# Altium PCB FPGA_Module_Panel.PcbDoc
Units mm, origin at the board's own origin, x right, y up, seen from the top; angles counter-clockwise.
Board outline 102 x 70 mm, 6 copper layers (Top Layer, Int1 (GND), Int2 (Sign), Int3 (Sign), Int4 (GND), Bottom Layer), stack 1.482 mm thick; 12 components, 210 nets, 12 pads, 0 vias.
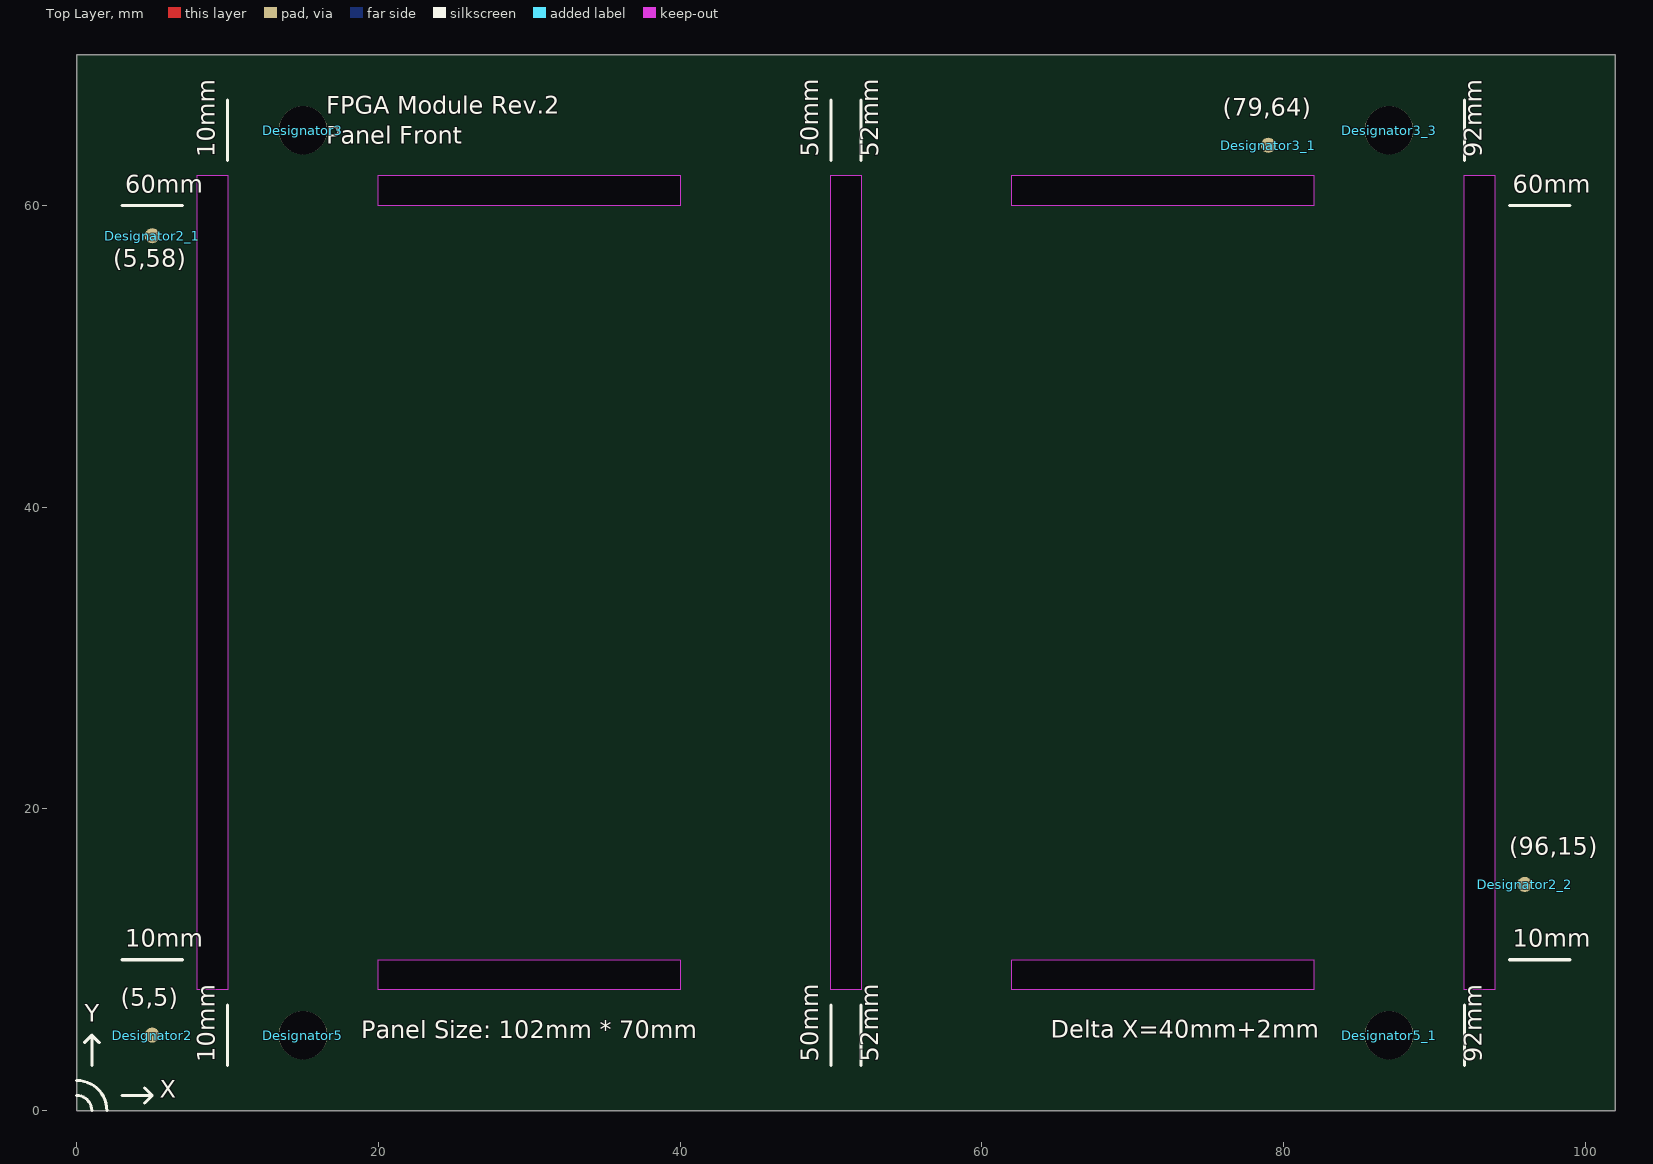
[diagram p0: Top Layer view]
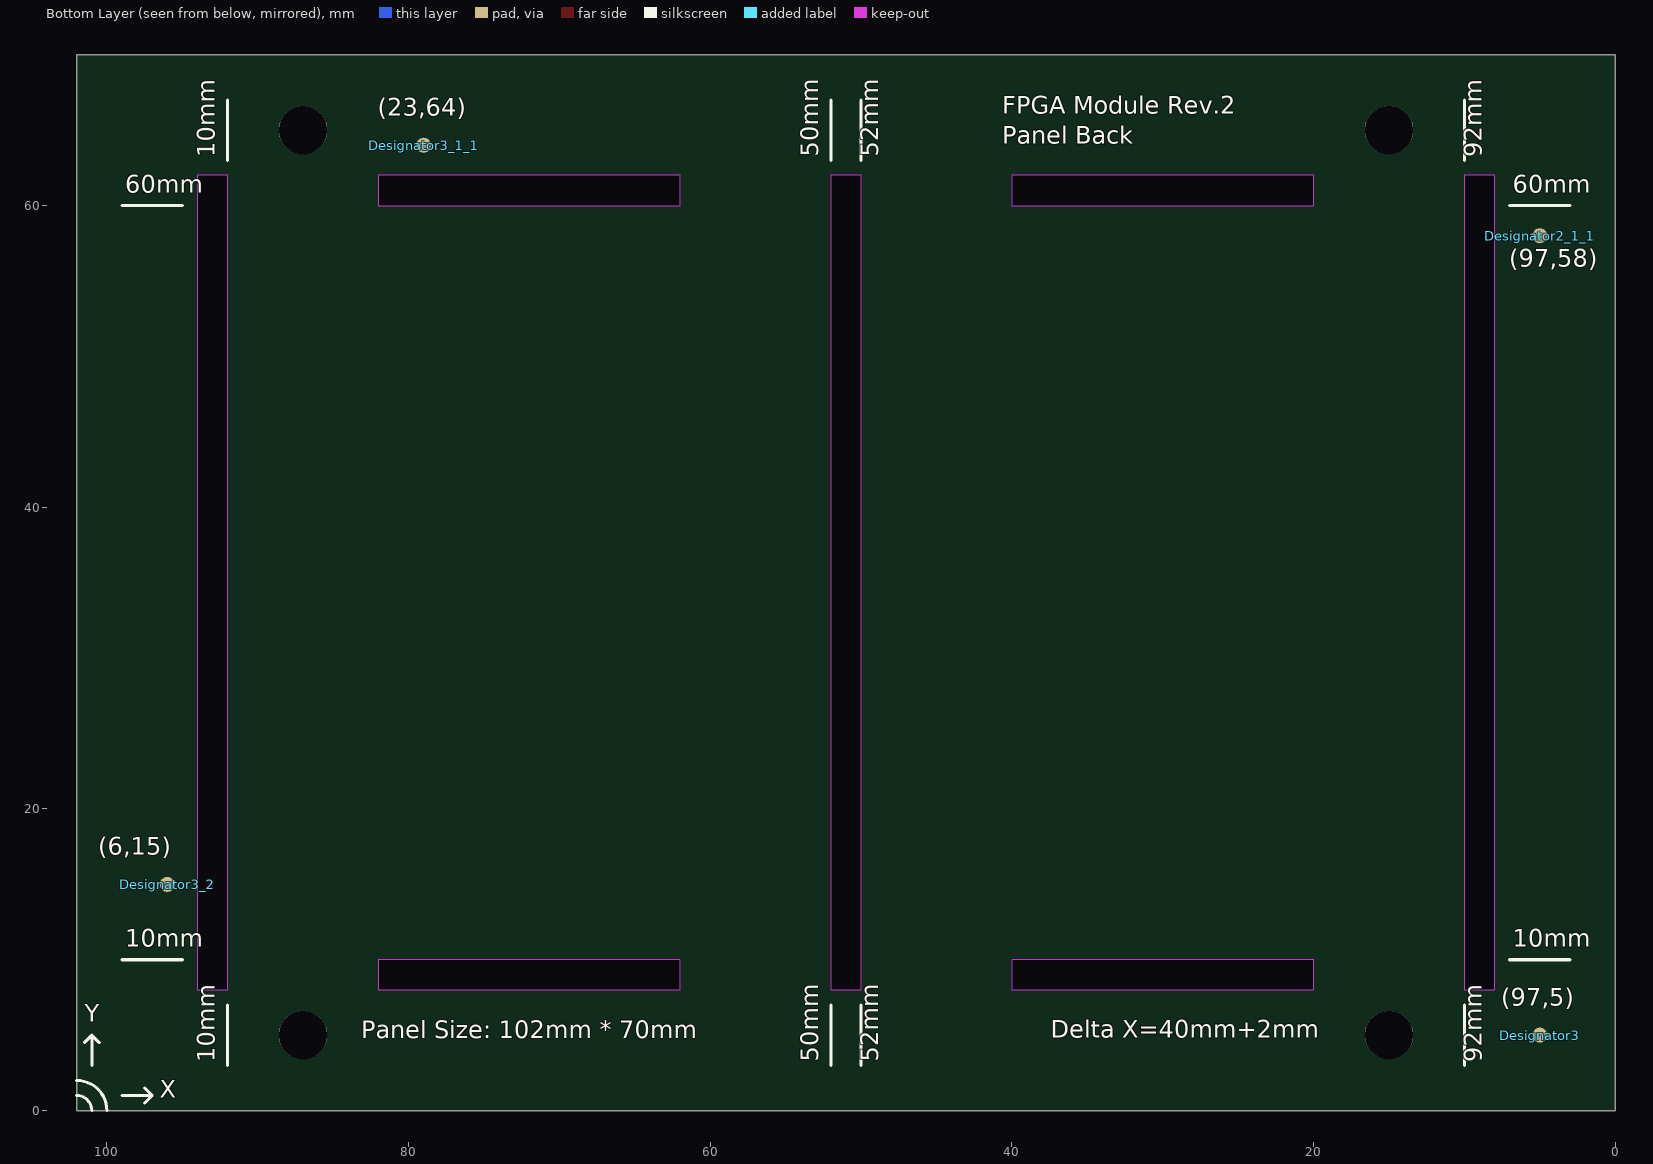
[diagram p1: Bottom Layer view, seen from below]

## Layer stack, top to bottom
Top Solder: solder mask 0.0254, Green, Dk 4
Top Layer: signal copper 0.035
Dielectric 1: prepreg 0.08, 1x1080, Dk 3.68
Int1 (GND): signal copper 0.018
Dielectric 3: core 0.09, 1x3313, Dk 4
Int2 (Sign): signal copper 0.018
Dielectric 5: core 1, TBD, Dk 3.8
Int3 (Sign): signal copper 0.018
Dielectric 6: core 0.09, 1x3313, Dk 4
Int4 (GND): signal copper 0.018
Dielectric 8: prepreg 0.08, 1x1080, Dk 3.68
Bottom Layer: signal copper 0.035
Bottom Solder: solder mask 0.0254, Green, Dk 4

## Board outline
0,0 0,70 102,70 102,0
cut-out: 62,60 62,62 82,62 82,60
cut-out: 82,10 82,8 62,8 62,10
cut-out: 40,10 40,8 20,8 20,10
cut-out: 20,60 20,62 40,62 40,60
cut-out: 92,62 94,62 94,8 92,8
cut-out: 8,62 10,62 10,8 8,8
cut-out: 50,62 52,62 52,8 50,8

## Design rules (kind name [scope] priority, off if disabled: settings)
Clearance Clearance_1 [InNetClass('DDR3 ADDR') or InNetClass('DQ0') or InNetClass('DQ1')  or InNetClass('DQ2') or InNetClass('DQ3')] p1: gap=0.1 ignorepadtopadclearanceinfootprint=FALSE
Clearance Clearance_0201 [HasFootprint('GEN_C_0201') or HasFootprint('GEN_R_0201')] p2: gap=0.1 ignorepadtopadclearanceinfootprint=FALSE
Clearance "Via to Pad_0201" [isVia vs isPad and (HasFootprint('GEN_C_0201') or HasFootprint('GEN_R_0201')or HasFootprint('GEN_R_0402')or HasFootprint('GEN_C_0402')or HasFootprint('MX_WSON8'))] p3: gap=0.1 ignorepadtopadclearanceinfootprint=FALSE except(0: SMDPad-Via SMDPad-Hole)
Clearance Clearance_U7 [InComponent('U7') vs InComponent('U7')] p4: gap=0.127 ignorepadtopadclearanceinfootprint=FALSE except(0.1: SMDPad-SMDPad)
Clearance Clearance_PG_1V0 [InNet('PG_1V0')] p5: gap=0.127 ignorepadtopadclearanceinfootprint=FALSE except(0.1: Arc-SMDPad Track-SMDPad)
Clearance "Via to Pad" [isVia vs IsPad or IsVia] p6: gap=0.127 ignorepadtopadclearanceinfootprint=FALSE except(0.102: SMDPad-Via)
Clearance [All] p7: gap=0.127 ignorepadtopadclearanceinfootprint=FALSE
ComponentClearance [All] p1: gap=0.127 collisioncheckmode=3 verticalgap=0.254 showdistances=FALSE
DiffPairsRouting "DDR3 Diff" [InDifferentialPairClass('DQS0') OR InDifferentialPairClass('DQS1') OR InDifferentialPairClass('DQS2') OR InDifferentialPairClass('DQS3') OR InDifferentialPairClass('DDR3_CLK')] p1: maxlimit=0.298 minlimit=0.13 mostfreqgap=0.2 toplayer_mingap=0.174 toplayer_maxgap=0.174 toplayer_prefgap=0.174 toplayer_minwidth=0.1 toplayer_maxwidth=0.1 toplayer_prefwidth=0.1 midlayer1_mingap=0.2 midlayer1_maxgap=0.2 midlayer1_minwidth=0.1 midlayer1_maxwidth=0.1 midlayer1_prefwidth=0.1 midlayer2_mingap=0.2 midlayer2_maxgap=0.2 midlayer2_minwidth=0.1 midlayer2_maxwidth=0.1 midlayer2_prefwidth=0.1 bottomlayer_mingap=0.174 bottomlayer_maxgap=0.174 bottomlayer_prefgap=0.174 bottomlayer_minwidth=0.1 bottomlayer_maxwidth=0.1 bottomlayer_prefwidth=0.1 impedanceprofiledriven=TRUE impedanceprofileid={B4F66E8A-C9E1-4981-A60F-E06AC573C475} impedanceprofilevalue=100.000000 maxuncoupledlength=12.7
DiffPairsRouting PCIe [InDifferentialPairClass('PCIe')] p2: maxlimit=0.127 minlimit=0.127 mostfreqgap=0.127 toplayer_maxgap=0.127 toplayer_minwidth=0.13 toplayer_maxwidth=0.13 toplayer_prefwidth=0.13 midlayer1_maxgap=0.127 midlayer1_minwidth=0.124 midlayer1_maxwidth=0.124 midlayer1_prefwidth=0.124 midlayer2_maxgap=0.127 midlayer2_minwidth=0.124 midlayer2_maxwidth=0.124 midlayer2_prefwidth=0.124 bottomlayer_maxgap=0.127 bottomlayer_minwidth=0.13 bottomlayer_maxwidth=0.13 bottomlayer_prefwidth=0.13 impedanceprofiledriven=TRUE impedanceprofileid={6C64B6C6-15D8-4231-9645-6D0B78814DEC} impedanceprofilevalue=85.000000 maxuncoupledlength=12.7
DiffPairsRouting "ADC LVDS" [InDifferentialPairClass('ADC LVDS')] p3: maxlimit=0.298 minlimit=0.13 mostfreqgap=0.2 toplayer_mingap=0.174 toplayer_maxgap=0.174 toplayer_prefgap=0.174 toplayer_minwidth=0.1 toplayer_maxwidth=0.1 toplayer_prefwidth=0.1 midlayer1_mingap=0.2 midlayer1_maxgap=0.2 midlayer1_minwidth=0.1 midlayer1_maxwidth=0.1 midlayer1_prefwidth=0.1 midlayer2_mingap=0.2 midlayer2_maxgap=0.2 midlayer2_minwidth=0.1 midlayer2_maxwidth=0.1 midlayer2_prefwidth=0.1 bottomlayer_mingap=0.174 bottomlayer_maxgap=0.174 bottomlayer_prefgap=0.174 bottomlayer_minwidth=0.1 bottomlayer_maxwidth=0.1 bottomlayer_prefwidth=0.1 impedanceprofiledriven=TRUE impedanceprofileid={B4F66E8A-C9E1-4981-A60F-E06AC573C475} impedanceprofilevalue=100.000000 maxuncoupledlength=12.7
HoleSize [All] p1: absolutevalues=TRUE maxlimit=3.2 minlimit=0.025 maxpercent=80.000 minpercent=20.000
MatchedLengths MatchLengths_xSignals_U1_U4,U5_CLK [InxSignalClass('xSignals_U1_U4,U5')] p1: tolerance=1 checknetsindiffpair=FALSE checkdiffpairvsdiffpair=TRUE checkxsignals=TRUE checkothers=TRUE usedelayunits=TRUE delaytolerance=5.000000 targetsourcename=DDR3_CLK_P_PP1
MatchedLengths MatchedLengths_PCIe_Pairs [InDifferentialPairClass('PCIe')] p2: tolerance=25.4 checknetsindiffpair=TRUE checkdiffpairvsdiffpair=FALSE checkxsignals=FALSE checkothers=FALSE usedelayunits=TRUE delaytolerance=1.000000
MatchedLengths MatchedLengths_DDR3_ADDR_CTRL [InNetClass('DDR3 ADDR')] p3 off: tolerance=25.4 checknetsindiffpair=FALSE checkdiffpairvsdiffpair=TRUE checkxsignals=TRUE checkothers=TRUE usedelayunits=TRUE delaytolerance=5.000000
MatchedLengths MatchedLengths_DDR3_DQ0 [InDifferentialPairClass('DQS0') or InNetClass('DQ0')] p4: tolerance=25.4 checknetsindiffpair=FALSE checkdiffpairvsdiffpair=TRUE checkxsignals=TRUE checkothers=TRUE usedelayunits=TRUE delaytolerance=5.000000
MatchedLengths MatchedLengths_DDR3_DQ1 [InDifferentialPairClass('DQS1') or InNetClass('DQ1')] p5: tolerance=25.4 checknetsindiffpair=FALSE checkdiffpairvsdiffpair=TRUE checkxsignals=TRUE checkothers=TRUE usedelayunits=TRUE delaytolerance=5.000000
MatchedLengths MatchedLengths_DDR3_DQ2 [InDifferentialPairClass('DQS2') or InNetClass('DQ2')] p6: tolerance=25.4 checknetsindiffpair=FALSE checkdiffpairvsdiffpair=TRUE checkxsignals=TRUE checkothers=TRUE usedelayunits=TRUE delaytolerance=5.000000
MatchedLengths MatchedLengths_DDR3_DQ3 [InDifferentialPairClass('DQS3') or InNetClass('DQ3')] p7: tolerance=25.4 checknetsindiffpair=FALSE checkdiffpairvsdiffpair=TRUE checkxsignals=TRUE checkothers=TRUE usedelayunits=TRUE delaytolerance=5.000000
MatchedLengths MatchedLengths_ADC_Groups [InDifferentialPairClass('ADC LVDS')] p8: tolerance=25.4 checknetsindiffpair=FALSE checkdiffpairvsdiffpair=TRUE checkxsignals=TRUE checkothers=TRUE usedelayunits=TRUE delaytolerance=5.000000
MatchedLengths MatchedLengths_ADC_Pairs [InDifferentialPairClass('ADC LVDS')] p9: tolerance=25.4 checknetsindiffpair=TRUE checkdiffpairvsdiffpair=FALSE checkxsignals=FALSE checkothers=FALSE usedelayunits=TRUE delaytolerance=2.000000
MatchedLengths MatchedLengths_DDR3_Pairs [InDifferentialPairClass('DDR3_CLK') or InDifferentialPairClass('DQS0') or InDifferentialPairClass('DQS1') or InDifferentialPairClass('DQS2') or InDifferentialPairClass('DQS3')] p10: tolerance=25.4 checknetsindiffpair=TRUE checkdiffpairvsdiffpair=FALSE checkxsignals=FALSE checkothers=FALSE usedelayunits=TRUE delaytolerance=2.000000
MinimumSolderMaskSliver [All] p1: minsoldermaskwidth=0.098
PlaneClearance [All] p1: clearance=0.127
PlaneConnect [All] p1: pad.planeconnectstyle=Relief pad.reliefexpansion=0.508 pad.reliefentries=4 pad.reliefconductorwidth=0.254 pad.reliefairgap=0.254 via.planeconnectstyle=Direct via.reliefexpansion=0.508 via.reliefentries=4 via.reliefconductorwidth=0.254 via.reliefairgap=0.254
PolygonConnect PolygonConnect_Direct [HasFootprint('GEN_R_0603') or HasFootprint('GEN_R_0402') or HasFootprint('GEN_C_0603') or HasFootprint('GEN_C_0805') or HasFootprint('GEN_C_0402') or HasFootprint('VISH_TSOT6') or HasFootprint('GEN_C_1210') or HasFootprint('GEN_L_1210') or HasFootprint('TI_SOT563_DRL0006A')] p1: thpad.connectstyle=Relief thpad.reliefconductorwidth=0.254 thpad.reliefentries=4 thpad.polygonreliefangle="90 Angle" thpad.airgapwidth=0.254 smdpad.connectstyle=Direct smdpad.reliefconductorwidth=0.254 smdpad.reliefentries=4 smdpad.polygonreliefangle="90 Angle" smdpad.airgapwidth=0.254 via.connectstyle=Direct via.reliefconductorwidth=0.254 via.reliefentries=4 via.polygonreliefangle="90 Angle" via.airgapwidth=0.254
PolygonConnect PolygonConnect_1 [All] p2: thpad.connectstyle=Relief thpad.reliefconductorwidth=0.254 thpad.reliefentries=4 thpad.polygonreliefangle="90 Angle" thpad.airgapwidth=0.254 smdpad.connectstyle=Relief smdpad.reliefconductorwidth=0.254 smdpad.reliefentries=4 smdpad.polygonreliefangle="90 Angle" smdpad.airgapwidth=0.254 via.connectstyle=Direct via.reliefconductorwidth=0.254 via.reliefentries=4 via.polygonreliefangle="90 Angle" via.airgapwidth=0.254
RoutingVias [All] p1: holewidth=0.203 width=0.406 viastyle="Through Hole" minholewidth=0.203 minwidth=0.406 maxholewidth=0.203 maxwidth=0.406
SolderMaskExpansion [All] p1: expansion=0 istentingtop=FALSE
ViasUnderSMD [(HasFootprint('GEN_C_0201') OR HasFootprint('GEN_R_0201') OR HasFootprint('GEN_C_0402') OR HasFootprint('GEN_R_0402'))] p1: allowed=FALSE
Width Width_PG_1V0 [InNet('PG_1V0')] p1: maxlimit=0.254 minlimit=0.1 preferedwidth=0.127 midlayer1_minwidth=0.127 midlayer2_minwidth=0.127 midlayer3_minwidth=0.127 midlayer4_minwidth=0.127 bottomlayer_minwidth=0.127 minimp=50.000000 maximp=50.000000 favimp=50.000000
Width 50Z [(InNetClass('DDR3 ADDR')) OR (InNetClass('DQ0')) OR (InNetClass('DQ1')) OR (InNetClass('DQ2')) OR (InNetClass('DQ3'))] p2: maxlimit=0.213 minlimit=0.127 preferedwidth=0.127 midlayer1_maxwidth=0.156 midlayer2_maxwidth=0.156 impedanceprofiledriven=TRUE impedanceprofileid={CE169E51-C4CD-48BA-8376-F91FDF30A816} impedanceprofilevalue=50.000000 minimp=50.000000 maximp=50.000000 favimp=50.000000
Width [All] p3: maxlimit=1 minlimit=0.127 preferedwidth=0.254
24 further rules are at their usual default settings.

## Classes and differential pairs
differential pair class DDR3_CLK: DDR3_CLK
differential pair class DQS3: DDR3_DQS3
differential pair class DQS2: DDR3_DQS2
differential pair class DQS1: DDR3_DQS1
differential pair class DQS0: DDR3_DQS0
net class DQ3: DDR3_D24 DDR3_D25 DDR3_D26 DDR3_D27 DDR3_D28 DDR3_D29 DDR3_D30 DDR3_D31 DDR3_DM3
net class DQ2: DDR3_D16 DDR3_D17 DDR3_D18 DDR3_D19 DDR3_D20 DDR3_D21 DDR3_D22 DDR3_D23 DDR3_DM2
net class DQ1: DDR3_D8 DDR3_D9 DDR3_D10 DDR3_D11 DDR3_D12 DDR3_D13 DDR3_D14 DDR3_D15 DDR3_DM1
net class DQ0: DDR3_D0 DDR3_D1 DDR3_D2 DDR3_D3 DDR3_D4 DDR3_D5 DDR3_D6 DDR3_D7 DDR3_DM0
net class "DDR3 ADDR": DDR3_A0_T DDR3_A1_T DDR3_A2_T DDR3_A3_T DDR3_A4_T DDR3_A5_T DDR3_A6_T DDR3_A7_T DDR3_A8_T DDR3_A9_T DDR3_A10_T DDR3_A11_T DDR3_A12_T DDR3_BA0_T DDR3_BA1_T DDR3_BA2_T DDR3_CAS_T DDR3_CKE_T DDR3_ODT_T DDR3_RAS_T DDR3_S0_T DDR3_WE_T
differential pair class "ADC LVDS": D1A D1B D2A D2B D3A D3B D4A D4B FCLK LCLK
differential pair class PCIe: MGT_CLK1 MGT_RX0 MGT_RX1 MGT_RX2 MGT_RX3 MGT_TX0 MGT_TX1 MGT_TX2 MGT_TX3
differential pair DDR3_CLK: +DDR3_CLK_P -DDR3_CLK_N
differential pair DDR3_DQS3: +DDR3_DQS3_P -DDR3_DQS3_N
differential pair DDR3_DQS2: +DDR3_DQS2_P -DDR3_DQS2_N
differential pair DDR3_DQS1: +DDR3_DQS1_P -DDR3_DQS1_N
differential pair DDR3_DQS0: +DDR3_DQS0_P -DDR3_DQS0_N
differential pair LCLK: +LCLK_P -LCLK_N
differential pair FCLK: +FCLK_P -FCLK_N
differential pair D4B: +D4B_P -D4B_N
differential pair D4A: +D4A_P -D4A_N
differential pair D3B: +D3B_P -D3B_N
differential pair D3A: +D3A_P -D3A_N
differential pair D2B: +D2B_P -D2B_N
differential pair D2A: +D2A_P -D2A_N
differential pair D1B: +D1B_P -D1B_N
differential pair D1A: +D1A_P -D1A_N
differential pair MGT_TX3: +MGT_TX3_P -MGT_TX3_N
differential pair MGT_TX2: +MGT_TX2_P -MGT_TX2_N
differential pair MGT_TX1: +MGT_TX1_P -MGT_TX1_N
differential pair MGT_TX0: +MGT_TX0_P -MGT_TX0_N
differential pair MGT_RX3: +MGT_RX3_P -MGT_RX3_N
differential pair MGT_RX2: +MGT_RX2_P -MGT_RX2_N
differential pair MGT_RX1: +MGT_RX1_P -MGT_RX1_N
differential pair MGT_RX0: +MGT_RX0_P -MGT_RX0_N
differential pair MGT_CLK1: +MGT_CLK1_P -MGT_CLK1_N

## Components (designator, comment, footprint, x,y, rotation, side; value= is the part's Value field where it differs from the comment)
Designator2 "Comment" GEN_FID 5,5 r0 top
Designator2_1 "Comment" GEN_FID 5,58 r0 top
Designator2_1_1 "Comment" GEN_FID 5,58 r180 bottom
Designator2_2 "Comment" GEN_FID 96,15 r180 top
Designator3 "Comment" "MH M3" 15,65 r0 top
Designator3 "Comment" GEN_FID 5,5 r180 bottom
Designator3_1 "Comment" GEN_FID 79,64 r0 top
Designator3_1_1 "Comment" GEN_FID 79,64 r180 bottom
Designator3_2 "Comment" GEN_FID 96,15 r0 bottom
Designator3_3 "Comment" "MH M3" 87,65 r180 top
Designator5 "Comment" "MH M3" 15,5 r0 top
Designator5_1 "Comment" "MH M3" 87,5 r180 top

## Footprints (in the part's own frame and the unit in brackets; to place one, negate y for a bottom-side part, rotate by r counter-clockwise, add the part's x,y. Pads: shape width x height; smd on the part's side, far side on the other; paste and mask are expansions set on the pad)
GEN_FID [mm]
  round 1 smd paste-1 mask+0.5: 1(0,0)
"MH M3" [mm]
  round 3.2 hole 3.2 unplated: 1(0,0)

## Nets (pads, with @x,y where several pads share a name; then routed paths per layer and width w, separated by ;. In a path a pad name is that pad's centre, name@x,y a point inside that pad or via, vN(x,y) a via of type N, cw(c..) or ccw(c..) an arc to the next point about the centre after c; other vN are vias at no path point)
1V0: 
1V0_MGT: 
1V2_MGT: 
1V8: 
1V35: 
+3V3: 
+3V3_IN: 
ACQ_EN: 
ADC_CSn: 
ADC_PD: 
ADC_PG: 
ADC_RSTn: 
ADC_SCLK: 
ADC_SDATA: 
AGND: 
ATTEN_1: 
ATTEN_2: 
ATTEN_3: 
ATTEN_4: 
D1A_N: 
D1A_P: 
D1B_N: 
D1B_P: 
D2A_N: 
D2A_P: 
D2B_N: 
D2B_P: 
D3A_N: 
D3A_P: 
D3B_N: 
D3B_P: 
D4A_N: 
D4A_P: 
D4B_N: 
D4B_P: 
DC_CPL_1: 
DC_CPL_2: 
DC_CPL_3: 
DC_CPL_4: 
DDR3_A0: 
DDR3_A0_T: 
DDR3_A1: 
DDR3_A1_T: 
DDR3_A2: 
DDR3_A2_T: 
DDR3_A3: 
DDR3_A3_T: 
DDR3_A4: 
DDR3_A4_T: 
DDR3_A5: 
DDR3_A5_T: 
DDR3_A6: 
DDR3_A6_T: 
DDR3_A7: 
DDR3_A7_T: 
DDR3_A8: 
DDR3_A8_T: 
DDR3_A9: 
DDR3_A9_T: 
DDR3_A10: 
DDR3_A10_T: 
DDR3_A11: 
DDR3_A11_T: 
DDR3_A12: 
DDR3_A12_T: 
DDR3_BA0: 
DDR3_BA0_T: 
DDR3_BA1: 
DDR3_BA1_T: 
DDR3_BA2: 
DDR3_BA2_T: 
DDR3_CAS: 
DDR3_CAS_T: 
DDR3_CKE: 
DDR3_CKE_T: 
DDR3_CLK_N: 
DDR3_CLK_P: 
DDR3_D0: 
DDR3_D1: 
DDR3_D2: 
DDR3_D3: 
DDR3_D4: 
DDR3_D5: 
DDR3_D6: 
DDR3_D7: 
DDR3_D8: 
DDR3_D9: 
DDR3_D10: 
DDR3_D11: 
DDR3_D12: 
DDR3_D13: 
DDR3_D14: 
DDR3_D15: 
DDR3_D16: 
DDR3_D17: 
DDR3_D18: 
DDR3_D19: 
DDR3_D20: 
DDR3_D21: 
DDR3_D22: 
DDR3_D23: 
DDR3_D24: 
DDR3_D25: 
DDR3_D26: 
DDR3_D27: 
DDR3_D28: 
DDR3_D29: 
DDR3_D30: 
DDR3_D31: 
DDR3_DM0: 
DDR3_DM1: 
DDR3_DM2: 
DDR3_DM3: 
DDR3_DQS0_N: 
DDR3_DQS0_P: 
DDR3_DQS1_N: 
DDR3_DQS1_P: 
DDR3_DQS2_N: 
DDR3_DQS2_P: 
DDR3_DQS3_N: 
DDR3_DQS3_P: 
DDR3_ODT: 
DDR3_ODT_T: 
DDR3_RAS: 
DDR3_RAS_T: 
DDR3_RESET: 
DDR3_S0: 
DDR3_S0_T: 
DDR3_WE: 
DDR3_WE_T: 
FCLK_N: 
FCLK_P: 
FE_EN: 
FE_PG: 
GND: 
LCLK_N: 
LCLK_P: 
LEDs_1: 
LEDs_2: 
MGT_CLK1_N: 
MGT_CLK1_P: 
MGT_RX0_N: 
MGT_RX0_P: 
MGT_RX1_N: 
MGT_RX1_P: 
MGT_RX2_N: 
MGT_RX2_P: 
MGT_RX3_N: 
MGT_RX3_P: 
MGT_TX0_N: 
MGT_TX0_P: 
MGT_TX1_N: 
MGT_TX1_P: 
MGT_TX2_N: 
MGT_TX2_P: 
MGT_TX3_N: 
MGT_TX3_P: 
NetC64_2: 
NetC73_1: 
NetC73_2: 
NetC78_2: 
NetC81_1: 
NetC81_2: 
NetC83_2: 
NetC86_1: 
NetC86_2: 
NetL1_1: 
NetL2_1: 
NetL3_1: 
NetR11_2: 
NetR14_1: 
NetR15_1: 
NetR17_1: 
NetR18_1: 
NetR45_1: 
NetR60_1: 
NetTP1_1: 
OSC_OE: 
PERST#: 
PG_1V0: 
PG_1V8: 
PGA_CSn_1: 
PGA_CSn_2: 
PGA_CSn_3: 
PGA_CSn_4: 
PGA_SCLK: 
PGA_SDIO: 
PROBE_COMP: 
PUDC: 
SCL: 
SDA: 
SPI_CLK: 
SPI_CS: 
SPI_CS_1V35: 
SPI_DQ0: 
SPI_DQ0_1V35: 
SPI_DQ1: 
SPI_DQ1_1V35: 
SPI_DQ2: 
SPI_DQ2_1V35: 
SPI_DQ3: 
SPI_DQ3_1V35: 
TCK: 
TDI: 
TDO: 
TEST_1: 
TEST_2: 
TEST_3: 
TMS: 
VTTREF: 
pads on no net: Designator2.1 Designator2_1.1 Designator2_1_1.1 Designator2_2.1 Designator3.1 Designator3_1.1 Designator3_1_1.1 Designator3_2.1 Designator3_3.1 Designator5.1 Designator5_1.1

## Silkscreen, mask and mechanical layers (free items; w line width, h text height)
Top Overlay:
  lines w0.2: 0,1 cw(c0,0) 1,0 ; 0,2 cw(c0,0) 2,0 ; 0.5,4.5 1,5 ; 1,3 1,5 ; 1.5,4.5 1,5 ; 3,1 5,1 ; 3,10 7,10 ; 3,60 7,60 ; 4.5,0.5 5,1 ; 4.5,1.5 5,1 ; 10,3 10,7 ; 10,63 10,67 ; 50,3 50,7 ; 50,63 50,67 ; 52,3 52,7 ; 52,63 52,67 ; 92,3 92,7 ; 92,63 92,67 ; 95,10 99,10 ; 95,60 99,60 ; 1,5 1,5 ; 1,5 1,5 ; 5,1 5,1
  text "(79,64)" at 75.968,65.555 h2
  text "FPGA Module Rev.2  / Panel Front" at 16.557,63.688 h2
  text "50mm" at 49.544,63.23 h2 r90
  text "52mm" at 53.544,63.23 h2 r90
  text "10mm" at 9.544,63.211 h2 r90
  text "92mm" at 93.552,63.197 h2 r90
  text "60mm" at 3.207,60.456 h2
  text "60mm" at 95.207,60.456 h2
  text "(5,58)" at 2.436,55.555 h2
  text "(96,15)" at 94.968,16.555 h2
  text "10mm" at 3.211,10.456 h2
  text "10mm" at 95.211,10.456 h2
  text "(5,5)" at 2.905,6.555 h2
  text "Y" at 0.531,5.5 h2
  text "Panel Size: 102mm * 70mm" at 18.846,4.414 h2
  text "Delta X=40mm+2mm" at 64.576,4.419 h2
  text "50mm" at 49.544,3.23 h2 r90
  text "52mm" at 53.544,3.23 h2 r90
  text "10mm" at 9.544,3.211 h2 r90
  text "92mm" at 93.552,3.197 h2 r90
  text "X" at 5.5,0.456 h2
Bottom Overlay:
  lines w0.2: 3,10 7,10 ; 3,60 7,60 ; 10,3 10,7 ; 10,63 10,67 ; 50,3 50,7 ; 50,63 50,67 ; 52,3 52,7 ; 52,63 52,67 ; 92,3 92,7 ; 92,63 92,67 ; 95,10 99,10 ; 95,60 99,60 ; 97.5,0.5 97,1 ; 97.5,1.5 97,1 ; 99,1 97,1 ; 100,0 cw(c102,0) 102,2 ; 100.5,4.5 101,5 ; 101,0 cw(c102,0) 102,1 ; 101,3 101,5 ; 101.5,4.5 101,5 ; 97,1 97,1 ; 101,5 101,5 ; 101,5 101,5
  text "(23,64)" at 82.032,65.555 h2
  text "FPGA Module Rev.2  / Panel Back" at 40.634,63.688 h2
  text "52mm" at 48.456,63.23 h2 r270
  text "50mm" at 52.456,63.23 h2 r270
  text "92mm" at 8.448,63.197 h2 r270
  text "10mm" at 92.456,63.211 h2 r270
  text "60mm" at 6.793,60.456 h2
  text "60mm" at 98.793,60.456 h2
  text "(97,58)" at 7.032,55.555 h2
  text "(6,15)" at 100.564,16.555 h2
  text "10mm" at 6.789,10.456 h2
  text "10mm" at 98.789,10.456 h2
  text "(97,5)" at 7.564,6.555 h2
  text "Y" at 101.469,5.5 h2
  text "Delta X=40mm+2mm" at 37.424,4.419 h2
  text "Panel Size: 102mm * 70mm" at 83.154,4.414 h2
  text "52mm" at 48.456,3.23 h2 r270
  text "50mm" at 52.456,3.23 h2 r270
  text "92mm" at 8.448,3.197 h2 r270
  text "10mm" at 92.456,3.211 h2 r270
  text "X" at 96.5,0.456 h2
Mechanical 1:
  lines w0.1: 0,10 102,10 ; 0,60 102,60 ; 104,9 103,10 ; 104,11 103,10 ; 104,59 103,60 ; 104,61 103,60 ; 107,10 103,10 ; 107,60 103,60 ; 0,0 102,0 102,70 0,70 0,0 ; 8,8 8,62 10,62 10,8 8,8 ; 9,60 9,60 ; 20,8 20,10 40,10 40,8 20,8 ; 20,60 40,60 40,62 20,62 20,60 ; 50,8 52,8 52,62 50,62 50,8 ; 62,8 82,8 82,10 62,10 62,8 ; 62,60 62,62 82,62 82,60 62,60 ; 92,8 92,62 94,62 94,8 92,8
  text "CUTOUT" at 27.262,60.456 h2
  text "CUTOUT" at 69.262,60.456 h2
  text "VGROOVE ALONG THIS LINE" at 107.548,59.456 h2
  text "CUTOUT" at 9.544,32.262 h2 r90
  text "CUTOUT" at 51.544,32.262 h2 r90
  text "CUTOUT" at 93.544,32.262 h2 r90
  text "VGROOVE ALONG THIS LINE" at 107.548,9.456 h2
  text "CUTOUT" at 27.262,8.456 h2
  text "CUTOUT" at 69.262,8.456 h2
Mechanical 7:
  drawing of 173 lines, arcs and shapes, not listed
  text "Dielectric Material: TU872" at 107.169,115.679 h2
  text "Layer" at 108.75,111.973 h1.58
  text "Name" at 115.434,111.973 h1.58
  text "Material" at 134,111.973 h1.58
  text "Thickness" at 145.914,111.973 h1.58
  text "Constant" at 155.604,111.973 h1.58
  text "Top Overlay" at 115.434,108.81 h1.58
  text "Top Solder" at 115.434,105.647 h1.58
  text "Green" at 134,105.647 h1.58
  text "0.025mm" at 145.914,105.647 h1.58
  text "4" at 155.604,105.647 h1.58
  text "Top Surface Finish" at 115.434,102.484 h1.58
  text "Nickel, Gold" at 134,102.484 h1.58
  text "0.004mm" at 145.914,102.484 h1.58
  text "1" at 108.75,99.321 h1.58
  text "Top Layer" at 115.434,99.321 h1.58
  text "Copper" at 134,99.321 h1.58
  text "0.035mm" at 145.914,99.321 h1.58
  text "Dielectric 1" at 115.434,96.157 h1.58
  text "1x1080" at 134,96.157 h1.58
  text "0.080mm" at 145.914,96.157 h1.58
  text "3.68" at 155.604,96.157 h1.58
  text "2" at 108.75,92.994 h1.58
  text "Int1 (GND)" at 115.434,92.994 h1.58
  text "Copper" at 134,92.994 h1.58
  text "0.018mm" at 145.914,92.994 h1.58
  text "Dielectric 3" at 115.434,89.831 h1.58
  text "1x3313" at 134,89.831 h1.58
  text "0.090mm" at 145.914,89.831 h1.58
  text "4" at 155.604,89.831 h1.58
  text "3" at 108.75,86.668 h1.58
  text "Int2 (Sign)" at 115.434,86.668 h1.58
  text "Copper" at 134,86.668 h1.58
  text "0.018mm" at 145.914,86.668 h1.58
  text "Dielectric 5" at 115.434,83.505 h1.58
  text "TBD" at 134,83.505 h1.58
  text "1.000mm" at 145.914,83.505 h1.58
  text "3.8" at 155.604,83.505 h1.58
  text "4" at 108.75,80.342 h1.58
  text "Int3 (Sign)" at 115.434,80.342 h1.58
  text "Copper" at 134,80.342 h1.58
  text "0.018mm" at 145.914,80.342 h1.58
  text "Dielectric 6" at 115.434,77.179 h1.58
  text "1x3313" at 134,77.179 h1.58
  text "0.090mm" at 145.914,77.179 h1.58
  text "4" at 155.604,77.179 h1.58
  text "5" at 108.75,74.015 h1.58
  text "Int4 (GND)" at 115.434,74.015 h1.58
  text "Copper" at 134,74.015 h1.58
  text "0.018mm" at 145.914,74.015 h1.58
  text "Dielectric 8" at 115.434,70.852 h1.58
  text "1x1080" at 134,70.852 h1.58
  text "0.080mm" at 145.914,70.852 h1.58
  text "3.68" at 155.604,70.852 h1.58
  text "6" at 108.75,67.689 h1.58
  text "Bottom Layer" at 115.434,67.689 h1.58
  text "Copper" at 134,67.689 h1.58
  text "0.035mm" at 145.914,67.689 h1.58
  text "Bottom Surface Finish" at 115.434,64.526 h1.58
  text "Nickel, Gold" at 134,64.526 h1.58
  text "0.004mm" at 145.914,64.526 h1.58
  text "Bottom Solder" at 115.434,61.363 h1.58
  text "Green" at 134,61.363 h1.58
  text "0.025mm" at 145.914,61.363 h1.58
  text "4" at 155.604,61.363 h1.58
  text "Bottom Overlay" at 115.434,58.2 h1.58
  text "Total board thickness:" at 108.75,55.036 h1.58
  text "1.541mm" at 145.914,55.036 h1.58
  text "Controlled Impedence Chart" at 107.137,49 h3
  text "Signal Layer" at 107.137,45.037 h2
  text "Reference Layer" at 115.556,45.037 h2
  text "Line Width" at 127.06,45.018 h2
  text "Diff Line Pitch" at 139,45.018 h2
  text "Target Impedence" at 151.356,45.018 h2
  text "1" at 107.137,41.073 h2
  text "2" at 115.556,41.073 h2
  text "0.127 mm" at 127.06,41.055 h2
  text "N/A" at 139,41.055 h2
  text "50 OHM  / Single Ended" at 150,41.055 h2
  text "3" at 107.137,37.11 h2
  text "2 & 4" at 115.556,37.11 h2
  text "0.127 mm" at 127.06,37.091 h2
  text "N/A" at 139,37.091 h2
  text "50 OHM  / Single Ended" at 150,37.091 h2
  text "4" at 107.137,33.146 h2
  text "3 & 5" at 115.556,33.146 h2
  text "0.127 mm" at 127.06,33.128 h2
  text "N/A" at 139,33.128 h2
  text "50 OHM  / Single Ended" at 150,33.128 h2
  text "6" at 107.137,29.183 h2
  text "5" at 115.556,29.183 h2
  text "0.127 mm" at 127.06,29.164 h2
  text "N/A" at 139,29.164 h2
  text "50 OHM  / Single Ended" at 150,29.164 h2
  text "0.1 mm" at 127.06,25.201 h2
  text "0.174 mm" at 139,25.201 h2
  text "100 OHM  / Differential" at 150,25.201 h2
  text "1" at 107.137,25.183 h2
  text "2" at 115.556,25.183 h2
  text "0.2 mm" at 139,21.291 h2
  text "2 & 4" at 115.556,21.256 h2
  text "0.1 mm" at 127.06,21.237 h2
  text "100 OHM  / Differential" at 150,21.237 h2
  text "3" at 107.137,21.219 h2
  text "0.2 mm" at 139,17.328 h2
  text "3 & 5" at 115.556,17.292 h2
  text "0.1 mm" at 127.06,17.274 h2
  text "100 OHM  / Differential" at 150,17.274 h2
  text "4" at 107.137,17.256 h2
  text "0.1 mm" at 127.06,13.31 h2
  text "0.174 mm" at 139,13.31 h2
  text "100 OHM  / Differential" at 150,13.31 h2
  text "6" at 107.137,13.292 h2
  text "5" at 115.556,13.292 h2
  text "0.13 mm" at 127.06,9.347 h2
  text "0.127 mm" at 139,9.347 h2
  text "85 OHM  / Differential" at 150,9.347 h2
  text "1" at 107.137,9.329 h2
  text "2" at 115.556,9.329 h2
  text "3 & 5" at 115.556,5.402 h2
  text "0.124 mm" at 127.06,5.383 h2
  text "0.127 mm" at 139,5.383 h2
  text "85 OHM  / Differential" at 150,5.383 h2
  text "4" at 107.137,5.365 h2
Drill Drawing:
  circle w0.254: c-33.852,89.2 r0.854
  lines w0.254: -34.706,81.09 -34.279,81.09 -33.852,80.664 -33.426,81.09 -32.999,81.09 -33.426,81.517 -32.999,81.944 -33.426,81.944 -33.852,82.371 -34.279,81.944 -34.706,81.944 -34.279,81.517 -34.706,81.09 ; -34.706,84.505 -32.999,84.505 -32.999,86.213 -34.706,86.213 -34.706,84.505 ; -34.706,93.896 -32.999,93.896 -33.852,92.188 -34.706,93.896 ; -34.706,96.03 -33.852,96.457 -32.999,96.03 -33.426,96.883 -32.999,97.737 -33.852,97.31 -34.706,97.737 -34.279,96.883 -34.706,96.03
  lines w0.381: -36.237,79.511 145.096,79.511 ; -36.237,98.719 145.096,98.719 ; -26.281,75.67 -26.281,102.56 ; -14.837,75.67 -14.837,102.56 ; 4.895,75.67 4.895,102.56 ; 13.635,75.67 13.635,102.56 ; 25.848,75.67 25.848,102.56 ; 50.499,75.67 50.499,102.56 ; 60.52,75.67 60.52,102.56 ; 72.686,75.67 72.686,102.56 ; 85.176,75.67 85.176,102.56 ; 99.604,75.67 99.604,102.56 ; 121.774,75.67 121.774,102.56 ; -36.237,75.67 145.096,75.67 145.096,102.56 -36.237,102.56 -36.237,75.67
  text "Symbol" at -33.932,99.871 h2.4
  text "Count" at -25.129,99.871 h2.4
  text "Hole Size" at -13.684,99.871 h2.4
  text "Plated" at 6.048,99.871 h2.4
  text "Hole Type" at 14.788,99.871 h2.4
  text "Drill Layer Pair" at 27,99.871 h2.4
  text "Via/Pad" at 51.651,99.871 h2.4
  text "Pad Shape" at 61.672,99.871 h2.4
  text "Template" at 73.838,99.871 h2.4
  text "Description" at 86.328,99.871 h2.4
  text "Hole Tolerance (+)" at 100.756,99.871 h2.4
  text "Hole Tolerance (-)" at 122.926,99.871 h2.4
  text "4" at -25.129,96.03 h2
  text "3.200mm (125.98mil)" at -13.684,96.03 h2
  text "NPTH" at 6.048,96.03 h2
  text "Round" at 14.788,96.03 h2
  text "Top Layer - Bottom Layer" at 27,96.03 h2
  text "Pad" at 51.651,96.03 h2
  text "Rounded" at 61.672,96.03 h2
  text "c320hn320" at 73.838,96.03 h2
  text "8" at -25.129,92.188 h2
  text "3.200mm (125.98mil)" at -13.684,92.188 h2
  text "PTH" at 6.048,92.188 h2
  text "Round" at 14.788,92.188 h2
  text "Top Layer - Bottom Layer" at 27,92.188 h2
  text "Pad" at 51.651,92.188 h2
  text "Rounded" at 61.672,92.188 h2
  text "c540h320" at 73.838,92.188 h2
  text "12" at -25.129,88.347 h2
  text "1.000mm (39.37mil)" at -13.684,88.347 h2
  text "PTH" at 6.048,88.347 h2
  text "Round" at 14.788,88.347 h2
  text "Top Layer - Bottom Layer" at 27,88.347 h2
  text "Pad" at 51.651,88.347 h2
  text "Rounded" at 61.672,88.347 h2
  text "c150h100" at 73.838,88.347 h2
  text "12" at -25.129,84.505 h2
  text "1.500mm (59.06mil)" at -13.684,84.505 h2
  text "NPTH" at 6.048,84.505 h2
  text "Round" at 14.788,84.505 h2
  text "Top Layer - Bottom Layer" at 27,84.505 h2
  text "Pad" at 51.651,84.505 h2
  text "Rounded" at 61.672,84.505 h2
  text "c150hn150" at 73.838,84.505 h2
  text "1276" at -25.129,80.664 h2
  text "0.203mm (8.00mil)" at -13.684,80.664 h2
  text "PTH" at 6.048,80.664 h2
  text "Round" at 14.788,80.664 h2
  text "Top Layer - Bottom Layer" at 27,80.664 h2
  text "Via" at 51.651,80.664 h2
  text "Rounded" at 61.672,80.664 h2
  text "v41h20m0mx0" at 73.838,80.664 h2
  text "1312 Total" at -25.129,76.822 h2

## Panel: embedded boards
"FPGA_Module.PcbDoc" at 10,10, 1 rows x 2 columns, spacing 63.5 x 42, rotation 0